# EAGLE board breakout (EAGLE 8.3.2), part 1 of 2
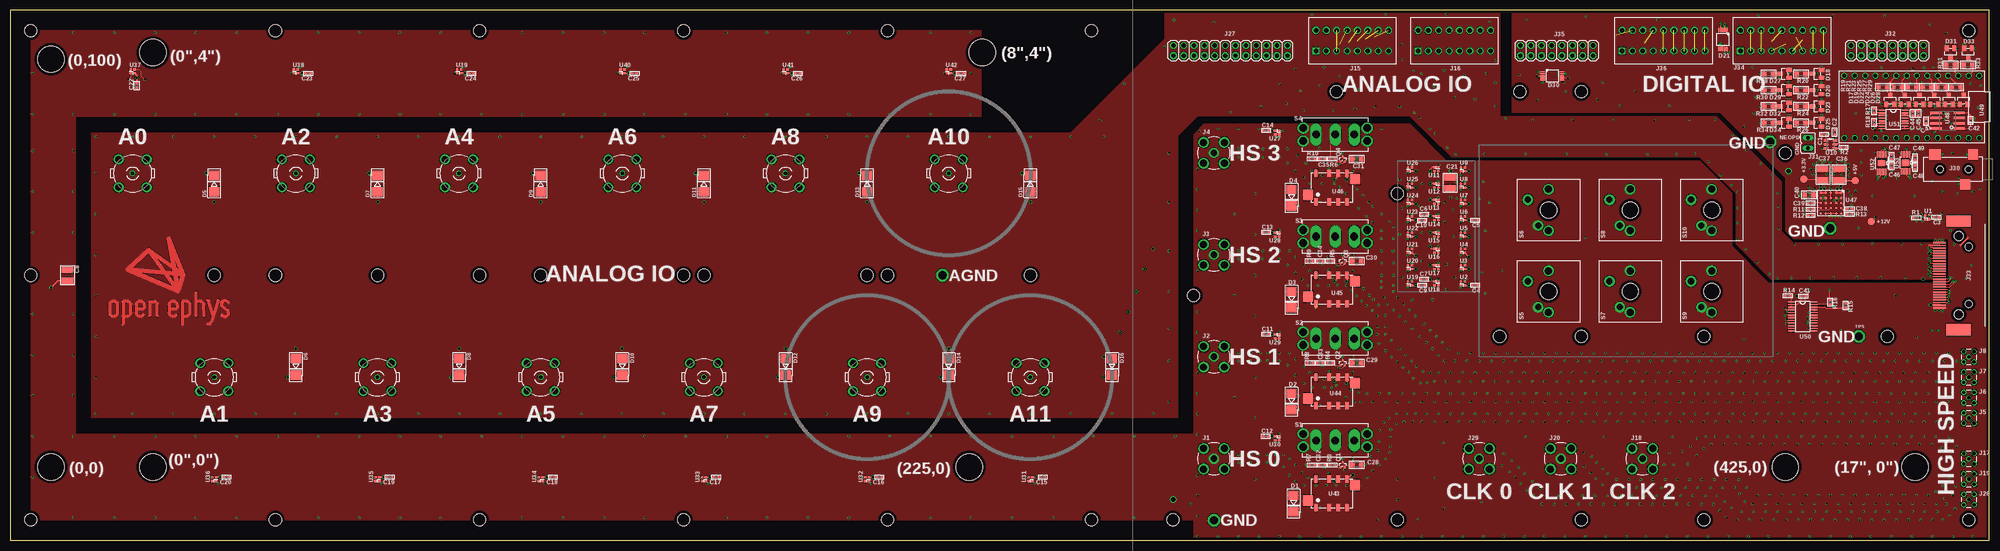
[diagram p0: board, top side]
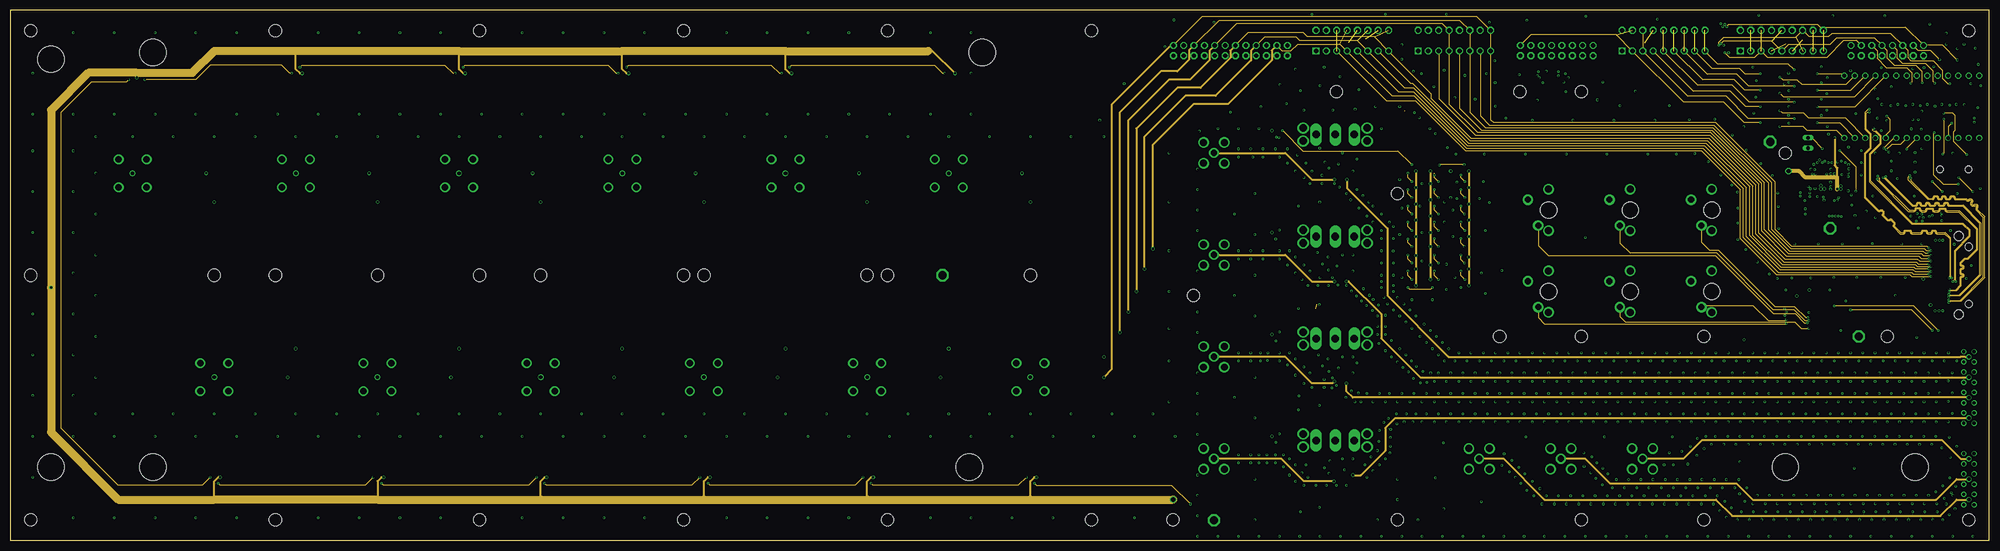
[diagram p1: board, inner layer HighSpeed]
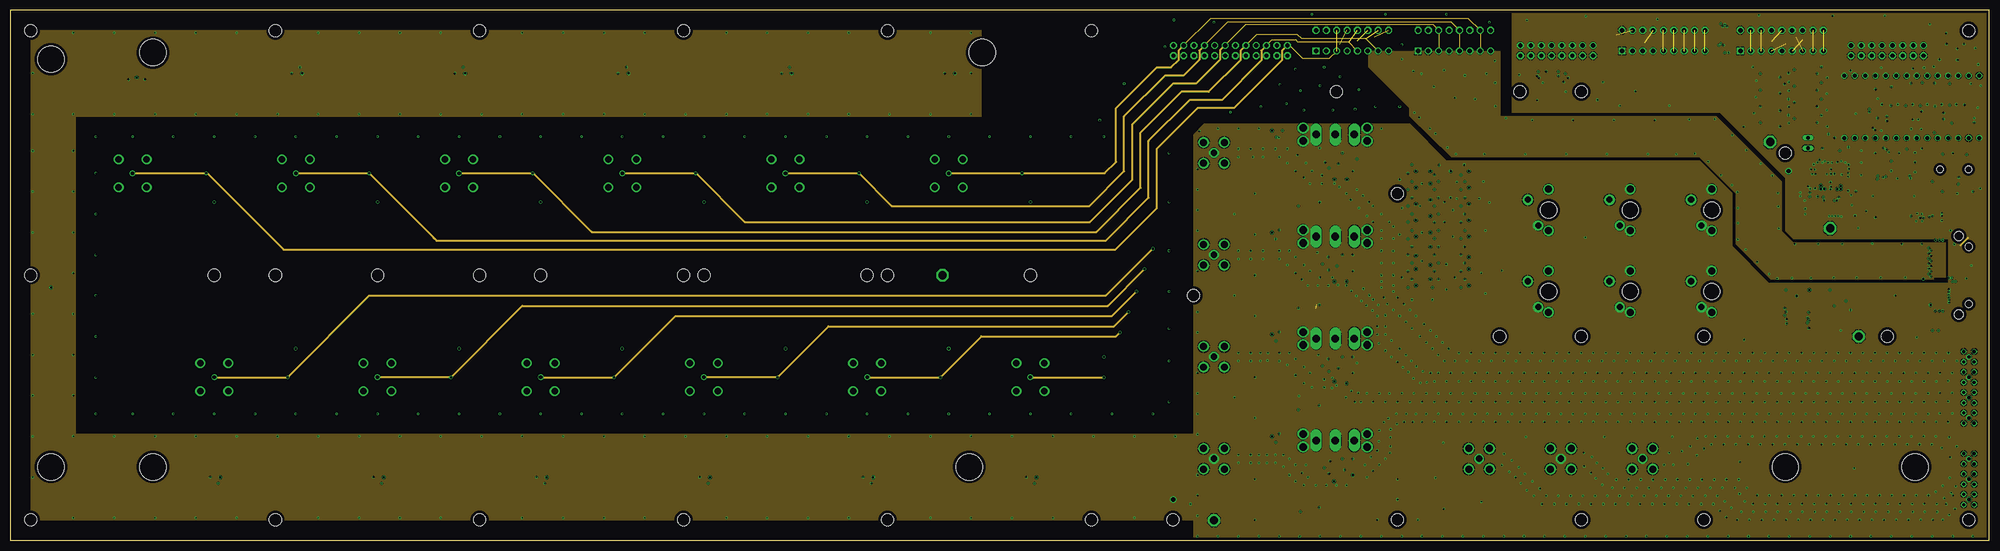
[diagram p2: board, inner layer GND2]
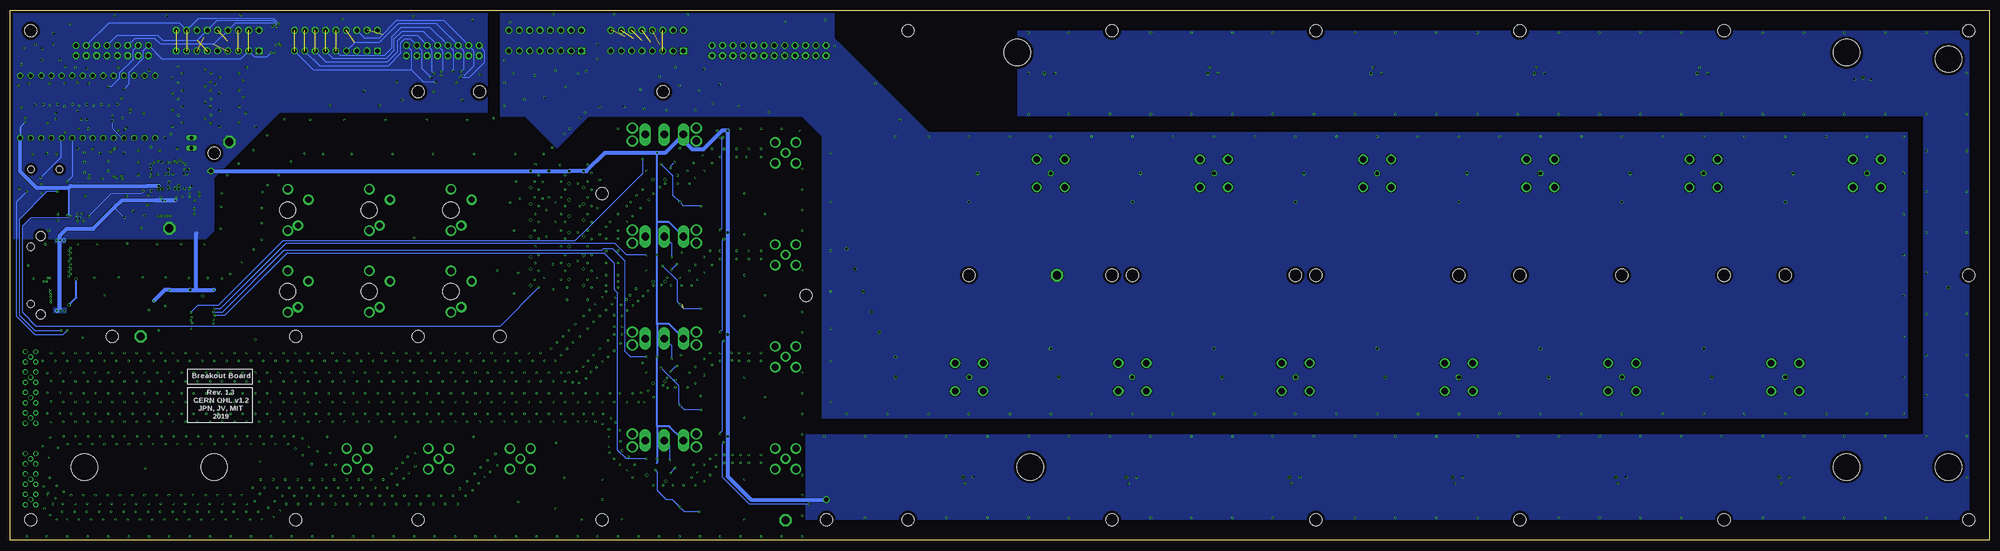
[diagram p3: board, bottom side, seen from below]

Size 485 x 130 mm. Coordinates in mm from the lower left corner, seen from the top.
Outline: 485,0 485,130 0,130 0,0 485,0
Copper layers (1+2*3+16): GND1 0.035mm / dielectric 0.2mm / HighSpeed 0.0175mm / dielectric 1.065mm / GND2 0.0356mm / dielectric 0.2007mm / LowSpeed 0.035mm
Design rules "jlcpcb-4-layer_JLC7628-stackup *": minimum track width 0.1mm, minimum drill 0.2mm, track to track 3.5mil, track to pad 0.1mm, pad to pad 0.1mm, via to via 0.1mm, smd to smd 0mil, copper to edge 0.7mm, drill to drill 5mil, minimum pad ring 4mil, minimum via ring 4mil, stop-mask expansion 3mil, vias tented up to drill 100mil, thermal gap 10mil
Net classes: 1 stripline: width 0.48 mm, drill 0.5 mm, clearance 0.1 mm; 3 100 Ohm Diff Mid: width 0.19 mm, drill 0.3 mm, clearance 0.09 mm
Holes 3 mm at 5,125 5,5 480,125 480,5 265,125 285,5 265,5 215,5 165,5 115,5 65,5 65,125 115,125 165,125 215,125 65,65 115,65 165,65 215,65 5,65 290,60 325,110 385,5 370,110 415,5 385,110 50,65 90,65 130,65 170,65 210,65 250,65 435,95 415,50 385,50 460,50 365,50 340,85 340,5
Holes 6.5 mm at 10,18 35,18 10,118 35,119.6 238.2,119.6 466.8,18 235,18 435,18

## Footprints (pad centres in the part's own frame; a part is rotated, then mirrored left to right if it is on the bottom)
0402 = smd 0.686 x 0.762: 1 -0.533,0; 2 0.533,0
1210 = smd 1.651 x 2.794: 1 -1.397,0; 2 1.397,0
0805 = smd 0.965 x 1.524: 1 -1.041,0; 2 1.041,0
SMA-DO214AC = smd 2.3 x 2.5: A -2,0; C 2,0
SOT23 = smd 1 x 1.4: 1 -0.95,-1.1; 2 0.95,-1.1; 3 0,1.1
MSOP-10-3X3 = smd 1.1 x 0.29: 1 -2.35,1; 2 -2.35,0.5; 3 -2.35,0; 4 -2.35,-0.5; 5 -2.35,-1; 6 2.35,-1; 7 2.35,-0.5; 8 2.35,0; 9 2.35,0.5; 10 2.35,1
SMA_JACK_142-0701-201 = drill 1.575: CLK 0,0 | drill 1.702: GND$1 -2.54,2.54; GND$2 2.54,2.54; GND$3 -2.54,-2.54; GND$4 2.54,-2.54
MMCX-THRU = drill 0.8: GND@1 -1.27,1.27; GND@2 -1.27,-1.27; GND@3 1.27,-1.27; GND@4 1.27,1.27; SIG 0,0
0731010360 = drill 0.9: 1 0,0 | drill 1.6: 2 3.43,3.43; 3 -3.43,3.43; 4 -3.43,-3.43; 5 3.43,-3.43
SCREW8-2 = drill 1.1 square: 1 0,0 | drill 1.1 octagon: 2 2.54,0; 3 5.08,0; 4 7.62,0; 5 10.16,0; 6 12.7,0; 7 15.24,0; 8 17.78,0; 9 0,5.08; 10 2.54,5.08; 11 5.08,5.08; 12 7.62,5.08; 13 10.16,5.08; 14 12.7,5.08; 15 15.24,5.08; 16 17.78,5.08
2X12-BIG = drill 1.016 pad 1.676 octagon: 1 -13.97,-1.17; 2 -13.97,1.37; 3 -11.43,-1.17; 4 -11.43,1.37; 5 -8.89,-1.17; 6 -8.89,1.37; 7 -6.35,-1.17; 8 -6.35,1.37; 9 -3.81,-1.17; 10 -3.81,1.37; 11 -1.27,-1.17; 12 -1.27,1.37; 13 1.27,-1.17; 14 1.27,1.37; 15 3.81,-1.17; 16 3.81,1.37; 17 6.35,-1.17; 18 6.35,1.37; 19 8.89,-1.17; 20 8.89,1.37; 21 11.43,-1.17; 22 11.43,1.37; 23 13.97,-1.17; 24 13.97,1.37
35RASMT2BHNTRX = smd 2.4 x 2.55: 1 0.8,3.675; 5 -1.1,-3.675 | smd 2.9 x 2.75: 4 8.2,-3.575 | hole 1.6: 0,0; 7,0
JP2 = drill 0.914 long: 1 0,0; 2 2.54,0
2X08-BIG = drill 1.016 pad 1.676 octagon: 1 -8.89,-1.17; 2 -8.89,1.37; 3 -6.35,-1.17; 4 -6.35,1.37; 5 -3.81,-1.17; 6 -3.81,1.37; 7 -1.27,-1.17; 8 -1.27,1.37; 9 1.27,-1.17; 10 1.27,1.37; 11 3.81,-1.17; 12 3.81,1.37; 13 6.35,-1.17; 14 6.35,1.37; 15 8.89,-1.17; 16 8.89,1.37
12226-82X0-00XX = smd 0.335 x 3: 1 7.938,7.2; 2 6.668,7.2; 3 5.397,7.2; 4 4.128,7.2; 5 2.857,7.2; 6 1.587,7.2; 7 0.318,7.2; 8 -0.953,7.2; 9 -2.223,7.2; 10 -3.493,7.2; 11 -4.763,7.2; 12 -6.032,7.2; 13 -7.303,7.2; 14 7.303,7.2; 15 6.032,7.2; 16 4.763,7.2; 17 3.493,7.2; 18 2.223,7.2; 19 0.953,7.2; 20 -0.318,7.2; 21 -1.587,7.2; 22 -2.857,7.2; 23 -4.128,7.2; 24 -5.397,7.2; 25 -6.668,7.2; 26 -7.938,7.2 | smd 2.8 x 6: PAD1 -13.3,2.5; PAD2 13.3,2.5 | hole 1.8: 7,0; -7,0 | hole 2.3: 9.6,2.5; -9.6,2.5
SCREW9-2 = drill 1.1 square: 1 0,0 | drill 1.1 octagon: 2 2.54,0; 3 5.08,0; 4 7.62,0; 5 10.16,0; 6 12.7,0; 7 15.24,0; 8 17.78,0; 9 20.32,0; 10 0,5.08; 11 2.54,5.08; 12 5.08,5.08; 13 7.62,5.08; 14 10.16,5.08; 15 12.7,5.08; 16 15.24,5.08; 17 17.78,5.08; 18 20.32,5.08
SC75 = smd 0.356 x 0.503: 1 -0.508,-0.65; 2 0.508,-0.65; 3 0,0.65
CK_7101J1V3QE2 = drill 1.85 long: 1 0,0 | drill 1.85 pad 2.54 long: 2 0,4.7; 3 0,-4.7 | drill 1.85: P$4 -1.59,7.875; P$5 1.59,7.875; P$6 -1.59,-7.875; P$7 1.59,-7.875
CHERRY-MX = drill 1.714 pad 1.93: P$3 -5.08,0; P$4 5.08,0 | drill 1.5 pad 2.54: SW1 -3.81,2.54; SW2 2.54,5.08 | hole 4: 0,0
TP19R = smd 1.9 x 1.9: TP 0,0
TESTPOINT_2MM = drill 2 octagon: 1 0,0
NEOPIXEL-1.5X1.5 = smd 0.55 x 0.55: 1 -0.475,-0.475; 2 0.475,-0.475; 3 0.475,0.475; 4 -0.475,0.475
SOT23-6 = smd 0.65 x 1.06: 1 -0.95,-1.1; 2 0,-1.1; 3 0.95,-1.1; 4 0.95,1.1; 5 0,1.1; 6 -0.95,1.1
G6KU-2F-RF = smd 0.8 x 1.8: 1 0,-3.5; 1X6 5.4,3.5; 2 3.2,-3.5; 3 5.4,-3.5; 4 7.6,-3.5; 5 7.6,3.5; 6 3.2,3.5; 7 0,3.5 | smd 2.5 x 2.5: CASE1 -1.95,-1.75; CASE2 9.55,2.05
BGA_5X5_625X625 = smd 0.635 x 0.635: A1 -2.54,2.54; A2 -1.27,2.54; A3 0,2.54; A4 1.27,2.54; A5 2.54,2.54; B1 -2.54,1.27; B2 -1.27,1.27; B3 0,1.27; B4 1.27,1.27; B5 2.54,1.27; C1 -2.54,0; C2 -1.27,0; C3 0,0; C4 1.27,0; C5 2.54,0; D1 -2.54,-1.27; D2 -1.27,-1.27; D3 0,-1.27; D4 1.27,-1.27; D5 2.54,-1.27; E1 -2.54,-2.54; E2 -1.27,-2.54; E3 0,-2.54; E4 1.27,-2.54; E5 2.54,-2.54
SO-08 = smd 0.6 x 2.708: 1 -1.905,-2.854; 2 -0.635,-2.854; 3 0.635,-2.854; 4 1.905,-2.854; 5 1.905,2.854; 6 0.635,2.854; 7 -0.635,2.854; 8 -1.905,2.854
TINY-FPGA-BX_BASIC = drill 0.965: 1 -7.62,13.97; 2 -7.62,11.43; 3 -7.62,8.89; 3.3V 7.62,11.43; 4 -7.62,6.35; 5 -7.62,3.81; 6 -7.62,1.27; 7 -7.62,-1.27; 8 -7.62,-3.81; 9 -7.62,-6.35; 10 -7.62,-8.89; 11 -7.62,-11.43; 12 -7.62,-13.97; 13 -7.62,-16.51; 14 7.62,-16.51; 15 7.62,-13.97; 16 7.62,-11.43; 17 7.62,-8.89; 18 7.62,-6.35; 19 7.62,-3.81; 20 7.62,-1.27; 21 7.62,1.27; 22 7.62,3.81; 23 7.62,6.35; 24 7.62,8.89; GND@1 -7.62,16.51; GND@2 7.62,13.97; VIN 7.62,16.51
TSSOP-24 = smd 1.6 x 0.3: 1 -2.8,3.575; 2 -2.8,2.925; 3 -2.8,2.275; 4 -2.8,1.625; 5 -2.8,0.975; 6 -2.8,0.325; 7 -2.8,-0.325; 8 -2.8,-0.975; 9 -2.8,-1.625; 10 -2.8,-2.275; 11 -2.8,-2.925; 12 -2.8,-3.575; 13 2.8,-3.575; 14 2.8,-2.925; 15 2.8,-2.275; 16 2.8,-1.625; 17 2.8,-0.975; 18 2.8,-0.325; 19 2.8,0.325; 20 2.8,0.975; 21 2.8,1.625; 22 2.8,2.275; 23 2.8,2.925; 24 2.8,3.575
TSSOP-16 = smd 1.6 x 0.3: 1 -2.8,2.275; 2 -2.8,1.625; 3 -2.8,0.975; 4 -2.8,0.325; 5 -2.8,-0.325; 6 -2.8,-0.975; 7 -2.8,-1.625; 8 -2.8,-2.275; 9 2.8,-2.275; 10 2.8,-1.625; 11 2.8,-0.975; 12 2.8,-0.325; 13 2.8,0.325; 14 2.8,0.975; 15 2.8,1.625; 16 2.8,2.275
MSOP-8-PAD-3X3 = smd 1.6 x 0.4: 1 -2.1,0.975; 2 -2.1,0.325; 3 -2.1,-0.325; 4 -2.1,-0.975; 5 2.1,-0.975; 6 2.1,-0.325; 7 2.1,0.325; 8 2.1,0.975 | smd 1.57 x 1.89: PAD 0,0

## Placement (x,y rotation side)
C1  0.1uF  [0402]  444.5,99.6 180 top
C2  0.1uF  [0402]  447.1,100.1 90 top
C3  0.1uF  [0402]  472,79.2 180 top
C4  0.1uF  [0402]  359,62.5 180 top
C5  0.1uF  [0402]  359,78.5 180 top
C6  0.1uF  [0402]  346.5,80 0 top
C7  0.1uF  [0402]  346.5,64 0 top
C8  47uF  [1210]  14,65 270 top
C9  0.1uF  [0402]  346,62.5 180 top
C10  0.1uF  [0402]  346,78.5 180 top
C11  0.1uF  [0402]  307.8,50.5 0 top
C12  0.1uF  [0402]  307.7,25.5 0 top
C13  0.1uF  [0402]  307.8,75.5 0 top
C14  0.1uF  [0402]  307.8,100.5 0 top
C15  0.1uF  [0402]  253,15.5 180 top
C16  0.1uF  [0402]  213,15.5 180 top
C17  0.1uF  [0402]  173,15.5 180 top
C18  0.1uF  [0402]  133,15.5 180 top
C19  0.1uF  [0402]  93,15.5 180 top
C20  0.1uF  [0402]  53,15.5 180 top
C21  47uF  [1210]  352.9,87.7 90 top
C22  0.1uF  [0402]  31,111.5 90 top
C23  0.1uF  [0402]  73,114.5 180 top
C24  0.1uF  [0402]  113,114.5 180 top
C25  0.1uF  [0402]  153,114.5 180 top
C26  0.1uF  [0402]  193,114.5 180 top
C27  0.1uF  [0402]  233,114.5 180 top
C28  10uF  [0805]  330,18.5 180 top
C29  10uF  [0805]  330,43.5 180 top
C30  10uF  [0805]  330,68.5 180 top
C31  10uF  [0805]  330,93.5 180 top
C32  47nF  [0402]  321.5,18.5 0 top
C33  47nF  [0402]  321,43.5 0 top
C34  47nF  [0402]  321,68.5 0 top
C35  47nF  [0402]  321.5,93.5 0 top
C36  47uF  [1210]  448.2,89.7 270 top
C37  47uF  [1210]  444.2,89.7 270 top
C38  0.1uF  [0402]  450.8,81.3 180 top
C39  0.1uF  [0402]  441.2,82.7 0 top
C40  10uF  [0805]  440.8,84.7 0 top
C41  0.1uF  [0402]  469.5,102.8 90 top
C42  0.1uF  [0402]  480.4,103 270 top
C43  0.1uF  [0402]  439.4,59.9 0 top
C44  4.7nF  [0402]  466.2,104.7 270 top
C45  0.1uF  [0402]  467.6,104.7 270 top
C46  4.7nF  [0402]  461,91.8 270 top
C47  0.1uF  [0402]  461,94.1 90 top
C48  4.7nF  [0402]  466.8,91.5 270 top
C49  0.1uF  [0402]  466.8,93.8 90 top
D1  S1GTR  [SMA-DO214AC]  314.5,9 270 top
D2  S1GTR  [SMA-DO214AC]  314,34 270 top
D3  S1GTR  [SMA-DO214AC]  314,59 270 top
D4  S1GTR  [SMA-DO214AC]  314,84 270 top
D5  P6SMB18CA  [SMA-DO214AC]  50,87.5 90 top
D6  P6SMB18CA  [SMA-DO214AC]  70,42.5 270 top
D7  P6SMB18CA  [SMA-DO214AC]  90,87.5 90 top
D8  P6SMB18CA  [SMA-DO214AC]  110,42.5 270 top
D9  P6SMB18CA  [SMA-DO214AC]  130,87.5 90 top
D10  P6SMB18CA  [SMA-DO214AC]  150,42.5 270 top
D11  P6SMB18CA  [SMA-DO214AC]  170,87.5 90 top
D12  P6SMB18CA  [SMA-DO214AC]  190,42.5 270 top
D13  P6SMB18CA  [SMA-DO214AC]  210,87.5 90 top
D14  P6SMB18CA  [SMA-DO214AC]  230,42.5 270 top
D15  P6SMB18CA  [SMA-DO214AC]  250,87.5 90 top
D16  P6SMB18CA  [SMA-DO214AC]  270,42.5 270 top
D17  BAT54SLT1G  [SOT23]  460.7,108 0 top
D18  BAT54SLT1G  [SOT23]  442.8,114.4 90 top
D19  BAT54SLT1G  [SOT23]  464.3,108 0 top
D20  BAT54SLT1G  [SOT23]  442.8,110.4 90 top
D21  CM1213−08MR  [MSOP-10-3X3]  419.7,122.8 270 top
D22  BAT54SLT1G  [SOT23]  467.9,108 0 top
D23  BAT54SLT1G  [SOT23]  442.8,106.4 90 top
D24  BAT54SLT1G  [SOT23]  471.5,108 0 top
D25  BAT54SLT1G  [SOT23]  442.8,102.4 90 top
D26  BAT54SLT1G  [SOT23]  475.1,108 0 top
D27  BAT54SLT1G  [SOT23]  434.8,114.4 90 top
D28  BAT54SLT1G  [SOT23]  478.7,108 0 top
D29  BAT54SLT1G  [SOT23]  434.8,110.4 90 top
D30  CM1213−08MR  [MSOP-10-3X3]  377.9,113.9 0 top
D31  BAT54SLT1G  [SOT23]  475.5,119.6 180 top
D32  BAT54SLT1G  [SOT23]  434.8,106.4 90 top
D33  BAT54SLT1G  [SOT23]  479.8,119.6 180 top
D34  BAT54SLT1G  [SOT23]  434.8,102.4 90 top
J1  [SMA_JACK_142-0701-201]  295,20 0 top
J2  [SMA_JACK_142-0701-201]  295,45 0 top
J3  [SMA_JACK_142-0701-201]  295,70 0 top
J4  [SMA_JACK_142-0701-201]  295,95 0 top
J5  [MMCX-THRU]  480,30 0 top
J6  [MMCX-THRU]  480,35 0 top
J7  [MMCX-THRU]  480,40 0 top
J8  [MMCX-THRU]  480,45 0 top
J9  [0731010360]  30,90 0 top
J10  [0731010360]  50,40 0 top
J11  [0731010360]  70,90 0 top
J12  [0731010360]  90,40 0 top
J13  [0731010360]  110,90 0 top
J14  [0731010360]  130,40 0 top
J15  1789472  [SCREW8-2]  320,120 0 top
J16  1789472  [SCREW8-2]  345,120 0 top
J17  [MMCX-THRU]  480,20 0 top
J18  [SMA_JACK_142-0701-201]  400,20 0 top
J19  [MMCX-THRU]  480,15 0 top
J20  [SMA_JACK_142-0701-201]  380,20 0 top
J21  [0731010360]  150,90 0 top
J22  [0731010360]  170,40 0 top
J23  [0731010360]  190,90 0 top
J24  [0731010360]  210,40 0 top
J25  [0731010360]  230,90 0 top
J26  [0731010360]  250,40 0 top
J27  69168-124HLF  [2X12-BIG]  299,120 0 top
J28  [MMCX-THRU]  480,10 0 top
J29  [SMA_JACK_142-0701-201]  360,20 0 top
J30  SJ1-3514-SMT-TR  [35RASMT2BHNTRX]  479.9,91 180 top
J31  [JP2]  440.6,98.7 270 top
J32  69168-116HLF  [2X08-BIG]  460,120 0 top
J33  12226-8250-00FR  [12226-82X0-00XX]  480,65 90 top
J34  1888276  [SCREW9-2]  424,120 0 top
J35  69168-116HLF  [2X08-BIG]  379,120 0 top
J36  1888276  [SCREW9-2]  395,120 0 top
Q1  SI1012R  [SC75]  326.5,18.5 0 top
Q2  SI1012R  [SC75]  326.5,43.5 0 top
Q3  SI1012R  [SC75]  326.5,68.5 0 top
Q4  SI1012R  [SC75]  326.5,93.5 0 top
R1  500  [0402]  467.1,79.1 0 top
R2  4.7k  [0402]  449.3,96.4 180 top
R3  1k  [0402]  324,18.5 0 top
R4  1k  [0402]  323.5,43.5 180 top
R5  1k  [0402]  323.5,68.5 180 top
R6  1k  [0402]  324,93.5 180 top
R7  49.9  [0402]  319,18.5 180 top
R8  49.9  [0402]  318.5,43.5 180 top
R9  49.9  [0402]  318.5,68.5 180 top
R10  49.9  [0402]  319,93.5 180 top
R11  12.5k  [0402]  441.2,81.2 180 top
R12  649k  [0402]  441.2,79.7 180 top
R13  8.25k  [0402]  450.8,79.9 0 top
R14  4.7k  [0402]  435.6,60 0 top
R15  4.7k  [0402]  449.8,57.6 270 top
R16  4.7k  [0402]  446,58.4 270 top
R17  100  [0402]  456.8,105.3 270 top
R18  100  [0402]  456.8,102.5 90 top
R19  270, 0.5W  [0805]  458.9,111.1 180 top
R20  270, 0.5W  [0805]  438.9,114.4 180 top
R21  270, 0.5W  [0805]  462.5,111.1 180 top
R22  270, 0.5W  [0805]  438.9,110.4 180 top
R23  270, 0.5W  [0805]  466.1,111.1 180 top
R24  270, 0.5W  [0805]  438.9,106.4 180 top
R25  270, 0.5W  [0805]  469.7,111.1 180 top
R26  270, 0.5W  [0805]  438.9,102.4 180 top
R27  270, 0.5W  [0805]  473.3,111.1 180 top
R28  270, 0.5W  [0805]  430.9,114.4 180 top
R29  270, 0.5W  [0805]  476.9,111.1 180 top
R30  270, 0.5W  [0805]  430.9,110.4 180 top
R31  270, 0.5W  [0805]  475.5,116.6 180 top
R32  270, 0.5W  [0805]  430.9,106.4 180 top
R33  270, 0.5W  [0805]  479.8,116.6 180 top
R34  270, 0.5W  [0805]  430.9,102.4 180 top
S1  7101J1V3BE2  [CK_7101J1V3QE2]  324.7,24.5 270 top
S2  7101J1V3BE2  [CK_7101J1V3QE2]  324.7,49.5 270 top
S3  7101J1V3BE2  [CK_7101J1V3QE2]  324.7,74.5 270 top
S4  7101J1V3BE2  [CK_7101J1V3QE2]  324.7,99.5 270 top
S5  CHERRY-MX  [CHERRY-MX]  377,61 90 top
S6  CHERRY-MX  [CHERRY-MX]  377,81 90 top
S7  CHERRY-MX  [CHERRY-MX]  397,61 90 top
S8  CHERRY-MX  [CHERRY-MX]  397,81 90 top
S9  CHERRY-MX  [CHERRY-MX]  417,61 90 top
S10  CHERRY-MX  [CHERRY-MX]  417,81 90 top
TP1  [TP19R]  439.6,88.6 270 top
TP2  [TP19R]  452.2,88.2 270 top
TP3  [TESTPOINT_2MM]  446,76.5 0 top
TP4  [TESTPOINT_2MM]  431.3,97.7 90 top
TP5  [TESTPOINT_2MM]  453,50 0 top
TP6  [TESTPOINT_2MM]  295,4.9 0 top
TP7  [TESTPOINT_2MM]  228.5,65 0 top
TP8  [TP19R]  456.1,78.2 0 top
U1  SK6805-E-J  [NEOPIXEL-1.5X1.5]  469.8,79.2 0 top
U2  SK6805-E-J  [NEOPIXEL-1.5X1.5]  356,63 0 top
U3  SK6805-E-J  [NEOPIXEL-1.5X1.5]  356,67 0 top
U4  SK6805-E-J  [NEOPIXEL-1.5X1.5]  356,71 0 top
U5  SK6805-E-J  [NEOPIXEL-1.5X1.5]  356,75 0 top
U6  SK6805-E-J  [NEOPIXEL-1.5X1.5]  356,79 0 top
U7  SK6805-E-J  [NEOPIXEL-1.5X1.5]  356,83 0 top
U8  SK6805-E-J  [NEOPIXEL-1.5X1.5]  356,87 0 top
U9  SK6805-E-J  [NEOPIXEL-1.5X1.5]  356,91 0 top
U10  TXB0101  [SOT23-6]  446.1,97.1 270 top
U11  SK6805-E-J  [NEOPIXEL-1.5X1.5]  349.5,91 180 top
U12  SK6805-E-J  [NEOPIXEL-1.5X1.5]  349.5,87 180 top
U13  SK6805-E-J  [NEOPIXEL-1.5X1.5]  349.5,83 180 top
U14  SK6805-E-J  [NEOPIXEL-1.5X1.5]  349.5,79 180 top
U15  SK6805-E-J  [NEOPIXEL-1.5X1.5]  349.5,75 180 top
U16  SK6805-E-J  [NEOPIXEL-1.5X1.5]  349.5,71 180 top
U17  SK6805-E-J  [NEOPIXEL-1.5X1.5]  349.5,67 180 top
U18  SK6805-E-J  [NEOPIXEL-1.5X1.5]  349.5,63 180 top
U19  SK6805-E-J  [NEOPIXEL-1.5X1.5]  343,63 0 top
U20  SK6805-E-J  [NEOPIXEL-1.5X1.5]  343,67 0 top
U21  SK6805-E-J  [NEOPIXEL-1.5X1.5]  343,71 0 top
U22  SK6805-E-J  [NEOPIXEL-1.5X1.5]  343,75 0 top
U23  SK6805-E-J  [NEOPIXEL-1.5X1.5]  343,79 0 top
U24  SK6805-E-J  [NEOPIXEL-1.5X1.5]  343,83 0 top
U25  SK6805-E-J  [NEOPIXEL-1.5X1.5]  343,87 0 top
U26  SK6805-E-J  [NEOPIXEL-1.5X1.5]  343,91 0 top
U27  SK6805-E-J  [NEOPIXEL-1.5X1.5]  310.5,100 180 top
U28  SK6805-E-J  [NEOPIXEL-1.5X1.5]  310.5,75 180 top
U29  SK6805-E-J  [NEOPIXEL-1.5X1.5]  310.5,50 180 top
U30  SK6805-E-J  [NEOPIXEL-1.5X1.5]  310.5,25 180 top
U31  SK6805-E-J  [NEOPIXEL-1.5X1.5]  250,15 90 top
U32  SK6805-E-J  [NEOPIXEL-1.5X1.5]  210,15 90 top
U33  SK6805-E-J  [NEOPIXEL-1.5X1.5]  170,15 90 top
U34  SK6805-E-J  [NEOPIXEL-1.5X1.5]  130,15 90 top
U35  SK6805-E-J  [NEOPIXEL-1.5X1.5]  90,15 90 top
U36  SK6805-E-J  [NEOPIXEL-1.5X1.5]  50,15 90 top
U37  SK6805-E-J  [NEOPIXEL-1.5X1.5]  30,115 0 top
U38  SK6805-E-J  [NEOPIXEL-1.5X1.5]  70,115 0 top
U39  SK6805-E-J  [NEOPIXEL-1.5X1.5]  110,115 0 top
U40  SK6805-E-J  [NEOPIXEL-1.5X1.5]  150,115 0 top
U41  SK6805-E-J  [NEOPIXEL-1.5X1.5]  190,115 0 top
U42  SK6805-E-J  [NEOPIXEL-1.5X1.5]  230,115 0 top
U43  G6K-2F-RF  [G6KU-2F-RF]  320,11.5 0 top
U44  G6K-2F-RF  [G6KU-2F-RF]  320,36.5 0 top
U45  G6K-2F-RF  [G6KU-2F-RF]  320,61.5 0 top
U46  G6K-2F-RF  [G6KU-2F-RF]  320,86.5 0 top
U47  LTM4622A  [BGA_5X5_625X625]  446.2,82.7 270 top
U48  SI8610  [SO-08]  474.8,102.9 90 top
U49  TINY-FPGA-BX  [TINY-FPGA-BX_BASIC]  466,106.3 270 top
U50  TCA9555  [TSSOP-24]  439.3,54.9 0 top
U51  FIN1032MTCX  [TSSOP-16]  461.5,103.2 0 top
U52  SN65LVDS9638DGN  [MSOP-8-PAD-3X3]  458.6,92.5 270 top
U53  SN65LVDS9638DGN  [MSOP-8-PAD-3X3]  464.5,92.6 270 top
X  OE-LOGO_28X20  [OE-LOGO-28X20]  37.6,60.4 0 top

## Library data of the parts
C1-C27 C32-C39 C41-C49 D1-D34 J1-J36 Q1-Q4 R1-R34 S1-S10 TP1-TP8 U1-U47 U49-U53 X = jonnew
C28-C31 C40 = jonnew; MN: TDK Corp.; PARTNO: C2012X5R1Cxxxxxxx; VID: DK
U48 = CNP-ics 2

## Nets
!TCA_INT: R14.2 U50.1
+3V3: C1.1 C37.2 C43.2 C44.1 C45.1 C46.1 C47.1 C48.1 C49.1 D17.2 D18.2 D19.2 D20.2 D21.8 D22.2 D23.2 D24.2 D25.2 D26.2 D27.2 D28.2 D29.2 D30.8 D31.2 D32.2 D33.2 D34.2 R2.1 R14.1 R15.1 R16.1 TP1.TP U10.1 U47.D1 U47.E1 U50.24 U51.4 U51.16 U52.1 U53.1
+5V0: C2.1 C3.2 C4.2 C5.2 C6.2 C7.2 C8.2 C9.2 C10.2 C11.2 C12.2 C13.2 C14.2 C15.2 C16.2 C17.2 C18.2 C19.2 C20.2 C21.2 C22.2 C23.2 C24.2 C25.2 C26.2 C27.2 C36.2 C42.2 Q1.3 Q2.3 Q3.3 Q4.3 S1.3 S2.3 S3.3 S4.3 TP2.TP U1.2 U2.2 U3.2 U4.2 U5.2 U6.2 U7.2 U8.2 U9.2 U10.6 U11.2 U12.2 U13.2 U14.2 U15.2 U16.2 U17.2 U18.2 U19.2 U20.2 U21.2 U22.2 U23.2 U24.2 U25.2 U26.2 U27.2 U28.2 U29.2 U30.2 U31.2 U32.2 U33.2 U34.2 U35.2 U36.2 U37.2 U38.2 U39.2 U40.2 U41.2 U42.2 U47.A1 U47.B1 U48.1 U49.VIN
+12V: C40.2 J33.1 J33.26 TP8.TP U47.A2 U47.B2 U47.B3 U47.D2 U47.D3 U47.E2
AGND: D5.A D6.A D7.A D8.A D9.A D10.A D11.A D12.A D13.A D14.A D15.A D16.A J9.2 J9.3 J9.4 J9.5 J10.2 J10.3 J10.4 J10.5 J11.2 J11.3 J11.4 J11.5 J12.2 J12.3 J12.4 J12.5 J13.2 J13.3 J13.4 J13.5 J14.2 J14.3 J14.4 J14.5 J15.1 J15.2 J15.9 J15.10 J16.1 J16.2 J16.9 J16.10 J21.2 J21.3 J21.4 J21.5 J22.2 J22.3 J22.4 J22.5 J23.2 J23.3 J23.4 J23.5 J24.2 J24.3 J24.4 J24.5 J25.2 J25.3 J25.4 J25.5 J26.2 J26.3 J26.4 J26.5 J27.1 J27.3 J27.5 J27.7 J27.9 J27.11 J27.13 J27.15 J27.17 J27.19 J27.21 J27.23 J33.13 J33.14 TP7.1
AIO_0: D5.C J9.1 J15.3 J15.11 J27.24 J33.20
AIO_1: D6.C J10.1 J15.4 J15.12 J27.22 J33.7
AIO_2: D7.C J11.1 J15.5 J15.13 J27.20 J33.19
AIO_3: D8.C J12.1 J15.6 J15.14 J27.18 J33.6
AIO_4: D9.C J13.1 J15.7 J15.15 J27.16 J33.18
AIO_5: D10.C J14.1 J15.8 J15.16 J27.14 J33.5
AIO_6: D11.C J16.3 J16.11 J21.1 J27.12 J33.17
AIO_7: D12.C J16.4 J16.12 J22.1 J27.10 J33.4
AIO_8: D13.C J16.5 J16.13 J23.1 J27.8 J33.16
AIO_9: D14.C J16.6 J16.14 J24.1 J27.6 J33.3
AIO_10: D15.C J16.7 J16.15 J25.1 J27.4 J33.15
AIO_11: D16.C J16.8 J16.16 J26.1 J27.2 J33.2
BUTTON0: S6.SW1 U50.16
BUTTON1: S5.SW1 U50.9
BUTTON2: S8.SW1 U50.17
BUTTON3: S7.SW1 U50.14
BUTTON4: S10.SW1 U50.18
BUTTON5: S9.SW1 U50.8
DIN0: D30.4 J35.2 J36.2 J36.11 R34.2
DIN0_P: D34.3 R34.1 U49.14
DIN1: D30.3 J35.4 J36.3 J36.12 R26.2
DIN1_P: D25.3 R26.1 U49.15
DIN2: D30.2 J35.6 J36.4 J36.13 R32.2
DIN2_P: D32.3 R32.1 U49.16
DIN3: D30.1 J35.8 J36.5 J36.14 R24.2
DIN3_P: D23.3 R24.1 U49.9
DIN4: D30.10 J35.10 J36.6 J36.15 R30.2
DIN4_P: D29.3 R30.1 U49.10
DIN5: D30.9 J35.12 J36.7 J36.16 R22.2
DIN5_P: D20.3 R22.1 U49.11
DIN6: D30.7 J35.14 J36.8 J36.17 R28.2
DIN6_P: D27.3 R28.1 U49.12
DIN7: D30.6 J35.16 J36.9 J36.18 R20.2
DIN7_P: D18.3 R20.1 U49.13
DOUT0: D21.10 J32.2 J34.2 J34.11 R19.2
DOUT0_P: D17.3 R19.1 U49.8
DOUT1: D21.9 J32.4 J34.3 J34.12 R21.2
DOUT1_P: D19.3 R21.1 U49.7
DOUT2: D21.2 J32.6 J34.4 J34.13 R23.2
DOUT2_P: D22.3 R23.1 U49.6
DOUT3: D21.7 J32.8 J34.5 J34.14 R25.2
DOUT3_P: D24.3 R25.1 U49.5
DOUT4: D21.3 J32.10 J34.6 J34.15 R27.2
DOUT4_P: D26.3 R27.1 U49.4
DOUT5: D21.6 J32.12 J34.7 J34.16 R29.2
DOUT5_P: D28.3 R29.1 U49.3
DOUT6: D21.4 J32.14 J34.8 J34.17 R31.2
DOUT6_P: D31.3 R31.1 U49.2
DOUT7: D21.1 J32.16 J34.9 J34.18 R33.2
DOUT7_P: D33.3 R33.1 U49.1
GND: C1.2 C2.2 C3.1 C4.1 C5.1 C6.1 C7.1 C8.1 C9.1 C10.1 C11.1 C12.1 C13.1 C14.1 C15.1 C16.1 C17.1 C18.1 C19.1 C20.1 C21.1 C22.1 C23.1 C24.1 C25.1 C26.1 C27.1 C28.1 C29.1 C30.1 C31.1 C36.1 C37.1 C38.1 C39.1 C40.1 C42.1 C43.1 C44.2 C45.2 C46.2 C47.2 C48.2 C49.2 D1.A D2.A D3.A D4.A D17.1 D18.1 D19.1 D20.1 D21.5 D22.1 D23.1 D24.1 D25.1 D26.1 D27.1 D28.1 D29.1 D30.5 D31.1 D32.1 D33.1 D34.1 J1.GND$1 J1.GND$2 J1.GND$3 J1.GND$4 J2.GND$1 J2.GND$2 J2.GND$3 J2.GND$4 J3.GND$1 J3.GND$2 J3.GND$3 J3.GND$4 J4.GND$1 J4.GND$2 J4.GND$3 J4.GND$4 J5.GND@1 J5.GND@2 J5.GND@3 J5.GND@4 J6.GND@1 J6.GND@2 J6.GND@3 J6.GND@4 J7.GND@1 J7.GND@2 J7.GND@3 J7.GND@4 J8.GND@1 J8.GND@2 J8.GND@3 J8.GND@4 J17.GND@1 J17.GND@2 J17.GND@3 J17.GND@4 J18.GND$1 J18.GND$2 J18.GND$3 J18.GND$4 J19.GND@1 J19.GND@2 J19.GND@3 J19.GND@4 J20.GND$1 J20.GND$2 J20.GND$3 J20.GND$4 J28.GND@1 J28.GND@2 J28.GND@3 J28.GND@4 J29.GND$1 J29.GND$2 J29.GND$3 J29.GND$4 J31.2 J32.1 J32.3 J32.5 J32.7 J32.9 J32.11 J32.13 J32.15 J33.PAD1 J33.PAD2 J34.1 J34.10 J35.1 J35.3 J35.5 J35.7 J35.9 J35.11 J35.13 J35.15 J36.1 J36.10 R7.2 R8.2 R9.2 R10.2 R11.2 R12.2 R13.2 S1.2 S2.2 S3.2 S4.2 S5.SW2 S6.SW2 S7.SW2 S8.SW2 S9.SW2 S10.SW2 TP3.1 TP4.1 TP5.1 TP6.1 U1.4 U2.4 U3.4 U4.4 U5.4 U6.4 U7.4 U8.4 U9.4 U10.2 U11.4 U12.4 U13.4 U14.4 U15.4 U16.4 U17.4 U18.4 U19.4 U20.4 U21.4 U22.4 U23.4 U24.4 U25.4 U26.4 U27.4 U28.4 U29.4 U30.4 U31.4 U32.4 U33.4 U34.4 U35.4 U36.4 U37.4 U38.4 U39.4 U40.4 U41.4 U42.4 U43.7 U43.CASE1 U43.CASE2 U44.7 U44.CASE1 U44.CASE2 U45.7 U45.CASE1 U45.CASE2 U46.7 U46.CASE1 U46.CASE2 U47.B5 U47.C1 U47.C2 U47.C5 U47.D5 U48.4 U49.GND@1 U49.GND@2 U50.2 U50.3 U50.12 U50.21 U51.8 U51.9 U51.10 U51.12 U51.14 U51.15 U52.4 U52.PAD U53.3 U53.4 U53.PAD
HARP_CLKOUT: U48.2 U49.24
I2C_SCL: R15.2 U49.23 U50.22
I2C_SDA: R16.2 U49.22 U50.23
LOCKED: U9.3 U11.1
LVDS_DIN0_N [100 Ohm Diff Mid]: J33.23 U52.5
LVDS_DIN0_P [100 Ohm Diff Mid]: J33.10 U52.6
LVDS_DIN1_N [100 Ohm Diff Mid]: J33.11 U52.7
LVDS_DIN1_P [100 Ohm Diff Mid]: J33.24 U52.8
LVDS_DIN2_N [100 Ohm Diff Mid]: J33.25 U53.7
LVDS_DIN2_P [100 Ohm Diff Mid]: J33.12 U53.8
LVDS_DOUT0_N [100 Ohm Diff Mid]: J33.8 R17.1 U51.1
LVDS_DOUT0_P [100 Ohm Diff Mid]: J33.21 R17.2 U51.2
LVDS_DOUT1_N [100 Ohm Diff Mid]: J33.9 R18.1 U51.7
LVDS_DOUT1_P [100 Ohm Diff Mid]: J33.22 R18.2 U51.6
LVDS_IN_0: U49.18 U51.3
LVDS_IN_1: U49.17 U51.5
LVDS_OUT_0: U49.19 U52.3
LVDS_OUT_1: U49.20 U52.2
LVDS_OUT_2: U49.21 U53.2
N$1 [stripline]: J17.SIG J18.CLK
N$3 [stripline]: J19.SIG J20.CLK
N$4 [stripline]: J28.SIG J29.CLK
N$5: D1.C Q1.2 U43.1
N$7: U11.3 U12.1
N$8: U12.3 U13.1
N$9: U13.3 U14.1
N$10: U36.3 U37.1
N$11: U31.3 U32.1
N$13: U15.3 U16.1
N$14: U16.3 U17.1
N$15: C32.2 U43.6
N$16: C41.1 J30.1 U48.8
N$17: C41.2 J30.5 U48.5
N$18: J30.4 U48.6
N$19 [stripline]: J6.SIG U44.5
N$20: U17.3 U18.1
N$21: U1.3 U2.1
N$22: C33.1 R8.1
N$23: R3.1 S1.1
N$24: R13.1 U47.A4
N$25: R11.1 U47.E4
N$26: C38.2 U47.A3
N$27: C39.2 U47.E3
N$28 [stripline]: J5.SIG U43.5
N$29 [stripline]: J1.CLK U43.1X6
N$30: C32.1 R7.1
N$31: C33.2 U44.6
N$32: D3.C Q3.2 U45.1
N$33: C34.1 R9.1
N$34 [stripline]: J2.CLK U44.1X6
N$35: R4.2 S2.1
N$36: C34.2 U45.6
N$37 [stripline]: J7.SIG U45.5
N$38: R5.2 S3.1
N$39: D4.C Q4.2 U46.1
N$40: D2.C Q2.2 U44.1
N$41: U2.3 U3.1
N$42: U3.3 U4.1
N$43 [stripline]: J3.CLK U45.1X6
N$44: R6.2 S4.1
N$45: C35.1 R10.1
N$46: C35.2 U46.6
N$47 [stripline]: J8.SIG U46.5
N$48 [stripline]: J4.CLK U46.1X6
N$49: U4.3 U5.1
N$51: U6.3 U7.1
N$52: U7.3 U8.1
N$53: U8.3 U9.1
N$54: R1.2 U1.1
N$55: R1.1 U10.4
N$56: U5.3 U6.1
N$57: R2.2 U10.5
N$58: U14.3 U15.1
N$62: U32.3 U33.1
N$63: U33.3 U34.1
N$64: U34.3 U35.1
N$65: U35.3 U36.1
N$67: U37.3 U38.1
N$68: U38.3 U39.1
N$69: U39.3 U40.1
N$70: U40.3 U41.1
N$71: U41.3 U42.1
N$72: U18.3 U19.1
N$73: U19.3 U20.1
N$74: U20.3 U21.1
N$75: U21.3 U22.1
N$76: U22.3 U23.1
N$77: U23.3 U24.1
N$78: U24.3 U25.1
N$79: U25.3 U26.1
N$80: U26.3 U27.1
N$81: U27.3 U28.1
N$82: U28.3 U29.1
N$83: U29.3 U30.1
N$84: U30.3 U31.1
N$145: R12.1 U47.C4
NEOPIXEL_DIN: J31.1 U10.3
RELAY_SENSE_0: C28.2 Q1.1 R3.2 U50.6
RELAY_SENSE_1: C29.2 Q2.1 R4.1 U50.5
RELAY_SENSE_2: C30.2 Q3.1 R5.1 U50.4
RELAY_SENSE_3: C31.2 Q4.1 R6.1 U50.20

## Tracks (layer width: path | path; a pad name or v marks a point on that pad's centre or on a via)
!TCA_INT
  GND1 0.1: U50.1 436.5,59.63 R14.2
+3V3  (via drill 0.3, 0.5)
  GND1 0.1: R14.1 435.1,60.03 v435.1,61.4 | R2.1 v450.5,96.4 | U10.1 445,98.15 445.03,98.18
  GND1 0.2: U50.24 440.43,58.48 439.9,59 439.9,59.87 C43.2 | R16.1 445.9,59.03 v445.9,61.4 | R15.1 v449.8,58.72 | U51.4 457.62,103.53 v457.6,103.5 | D18.2 443.8,115.25 v443.8,116.1 | v443.8,112.24 443.8,111.35 D20.2 | v443.8,108.2 443.8,107.35 D23.2 | v443.8,104.2 443.8,103.35 D25.2 | v435.8,104.25 435.8,103.2 435.9,103.2 D34.2 | v435.8,108.2 435.8,107.35 D32.2 | D29.2 435.8,111.35 435.25,111.9 v434.8,111.9 | v435.8,114.6 435.8,115.35 D27.2 | D30.8 v379.4,113.9 | D21.8 419.7,121.2 v419.9,121.4 | v478.8,121.7 478.85,121.65 D33.2 | v474.5,121.7 474.55,121.65 D31.2 | v478.9,106.8 479.55,106.8 arc90 D28.2 | v475.3,106.7 475.85,106.7 arc90 D26.2 | v471.7,106.5 472.05,106.5 arc90 D24.2 | v468.1,106.6 468.5,106.6 arc90 468.9,107 468.9,106.95 arc-90 D22.2 | v464.5,106.6 465.1,106.6 arc90 465.4,106.9 D19.2 | v460.9,106.6 461.35,106.6 arc90 D17.2 | TP1.TP 444.2,88.6 C37.2 | v445.6,99.6 C1.1 445.03,98.18
  GND1 0.3: U51.16 465.96,105.47 C44.1 | C44.1 C45.1 467.63,105.2 v468.4,105.2 | C44.1 466.3,105.33 | C48.1 v466.8,92.7 C49.1 465.95,93.27 465.48,93.75 U53.1 | 461,93.5 C47.1 | 461,93.5 v461,93 C46.1 | 459.57,93.83 U52.1 460.68,93.5 461,93.5
  GND1 0.5: C37.2 444.1,88.2 | C43.2 440.9,60.87 v440.9,61.4
  GND1 0.508: U47.E1 U47.D1
  LowSpeed 0.1: 435.1,61.45 v435.1,61.4
  LowSpeed 1: 439.1,61.4 v435.1,61.4 | v449.8,58.72 447.12,61.4 v445.9,61.4 v440.9,61.4 439.1,61.4 | 439.1,61.4 439.4,61.7 439.4,75.3
  other vias: 443.7,86.2 444.6,86.2 443.7,87
  pour GND1 (rank 2, no thermals): 443.2,88.7 443.2,84.7 445.2,84.7 445.2,88.7
  pour LowSpeed (rank 3): 368,105 368,133.1 493,133.1 493,74 437,74 435,76 435,89 419,105
+5V0  (via drill 0.3, 0.3 pad 0.55, 0.5, 1)
  GND1 0.2: C2.1 v447.1,98.7 447.1,98.05 U10.6 | C3.2 470.99,78.72 U1.2
  GND1 0.3: Q3.3 v326.5,70 | Q2.3 v326.5,45 | Q1.3 v326.5,20 | Q4.3 v326.5,95 | U48.1 479.8,101 480.4,101.6 C42.2
  GND1 0.406: C19.2 92.44,15.47 v91.5,15.47 | C20.2 52.44,15.47 v51.5,15.47
  GND1 0.5: C36.2 448.3,88.2 TP2.TP | C42.2 481.25,102.47 v481.28,102.5 | C21.2 352.9,90.4 v353,90.5 | U24.2 344.48,82.53 v344.5,82.5 | U25.2 344.48,86.53 v344.5,86.5 | U26.2 344.48,90.53 v344.5,90.5 | U19.2 344.48,62.52 v344.5,62.5 C9.2 | U11.2 348.48,91.47 348,91 v348,90.5 | U9.2 357.5,90.53 v357.5,90.5 | U17.2 348,67.47 v348,67.5 | C7.2 v348,64 348.52,63.48 U18.2 | U8.2 357.5,86.53 v357.5,86.5 | U7.2 357.5,82.53 v357.5,82.5 | U6.2 357.5,78.53 v357.5,78.5 C5.2 | U5.2 357.5,74.53 v357.5,74.5 | U4.2 v357.5,69.5 | U3.2 357.48,66.53 v357.5,66.5 | U2.2 357.48,62.52 v357.5,62.5 C4.2 | U27.2 310,100.5 v309.17,100.5 C14.2 | C13.2 308.36,75.47 v309.2,75.47 U28.2 | U29.2 v309.2,50.48 309.18,50.5 C11.2 | U30.2 v309.2,25.48 309.18,25.5 C12.2 | v51.5,15.47 U36.2 | v91.5,15.47 U35.2 | U34.2 v131.5,15.47 131.53,15.5 C18.2 | U33.2 v171.5,15.47 172.44,15.47 C17.2 | U32.2 v211.5,15.47 212.44,15.47 C16.2 | U31.2 v251.5,15.47 252.44,15.47 C15.2 | C22.2 v31,113.5 31,114 U37.2 | C23.2 v71.5,114.5 70.5,114.5 U38.2 | C24.2 v111.5,114.5 110.5,114.5 U39.2 | C25.2 v151.5,114.5 150.5,114.5 arc-90 U40.2 | C26.2 v191.5,114.5 190.5,114.5 U41.2 | C8.2 11.6,63.6 v10,62 | U42.2 231.5,114.53 | 231.5,114.53 232.44,114.53 C27.2 | 231.5,114.53 v231.5,114.5 | v344.5,69.8 344.2,69.8 U21.2 | v344.5,66.5 343.5,66.5 U20.2 | v344.5,74.5 343.5,74.5 U22.2 | U23.2 344.48,78.53 v344.5,78.5 C10.2 | U15.2 348.02,75.47 v348,75.5 | U16.2 348.52,71.47 v348,72 | U14.2 348.02,79.47 v348,79.5 347.53,79.5 C6.2 | U13.2 348.02,83.47 v348,83.5 | U12.2 348.02,87.47 v348,87.5 | C3.2 471.4,79.2 v471,79.6
  GND1 0.508: U47.B1 U47.A1
  HighSpeed 0.5: 250,10 250,14.5 250.97,15.47 v251.5,15.47 | v211.5,15.47 211.5,15.5 211,15.5 210,14.5 210,10 | 170,10 170,14.5 171,15.5 171.5,15.5 v171.5,15.47 | 130,10 130,14.5 131,15.5 131.5,15.5 v131.5,15.47 | v91.5,15.47 91.47,15.5 91,15.5 90,14.5 90,10 | 50,10 50,14.5 51,15.5 51.48,15.5 v51.5,15.47 | 31,114.5 v31,113.5 31,114.65 | v71.5,114.5 71,114.5 70,115.5 70,120 | v111.5,114.5 111,114.5 110,115.5 110,120 | v151.5,114.5 151,114.5 150,115.5 150,120 | v191.5,114.5 191,114.5 190,115.5 190,120 | 225,120 226,120 v231.5,114.5 | v357.5,90.5 v357.5,86.5 v357.5,82.5 v357.5,78.5 v357.5,74.5 v357.5,69.5 v357.5,66.5 v357.5,62.5 | v344.5,90.5 v344.5,86.5 v344.5,82.5 v344.5,78.5 v344.5,74.5 v344.5,69.8 v344.5,66.5 v344.5,62.5 | v348,90.5 v348,87.5 v348,83.5 v348,79.5 v348,75.5 v348,72 v348,67.5 v348,64 | v447.1,98.7 447.1,92 447.78,91.32 447.78,89.05 arc-90 447.7,88.97 | 447.78,88.21 447.7,88.13
  HighSpeed 1: v435.8,90.5 438.4,90.5 439.93,88.97 447.7,88.97 447.7,88.13 v447.7,86.1
  HighSpeed 2: v285,10 250,10 210,10 170,10 130,10 90,10 50,10 26.5,10 10,26.5 v10,62 10,105.5 19.15,114.65 31,114.65 44.65,114.65 50,120 70,120 110,120 150,120 190,120 225,120
  LowSpeed 0.5: v326.5,95 326.5,95.1 326.6,95.2 326.8,95 v326.5,95 | 326.5,78 v326.5,70 326.5,53 | 326.5,53 v326.5,45 326.5,28 | 326.5,28 v326.5,20 326.5,19 | S3.3 323.5,78 326.5,78 | S2.3 323.5,53 326.5,53 | S1.3 323.5,28 326.5,28 | 326.5,78 v326.5,95 | v481.28,102.5 482.51,101.27 U49.VIN | 451.5,86.9 451.4,86.9 | v471,79.6 470.63,79.97 470.63,86.47
  LowSpeed 1: v326.5,95 324.5,95 S4.3 320,98 317.9,95.89 315.1,95.89 310.5,100.5 v309.17,100.5 309.17,75.5 v309.2,75.47 v309.2,50.48 v309.2,25.48 309.2,21.37 309.17,21.34 309.17,15.67 303.5,10 v285,10 | v448.6,86.9 451.4,86.9 470.2,86.9 470.63,86.47 478.57,86.47 482.51,90.41 U49.VIN | v435.8,90.5 v357.5,90.5 v353,90.5 v348,90.5 v344.5,90.5 343.83,90.5 339.33,95 326.8,95
  other vias: 448.6,86.1
  pour GND1 (rank 2, no thermals): 447.2,84.7 447.2,88.7 449.2,88.7 449.2,84.7
+12V  (via drill 0.3, 0.35)
  GND1 0.2: TP8.TP v457.1,79.2
  LowSpeed 0.2: v457.1,79.2 459.45,81.55
  LowSpeed 1: 471.8,73.7 v471.8,73.6 | v444.5,83.4 457.6,83.4 459.45,81.55 464.6,76.4 471.1,76.4 472.8,74.7 v472.8,73.6 472.8,56.8 473.3,56.3 v473.6,56.3
  other vias: 471.7,56.3 444.3,84.2 442.9,84.3 447.7,83.4 448.1,84.1 441,85.2 441,84.3 447,83.3 472.7,56.3 473.6,73.6
  pour GND1 (isolate 0.1, no thermals): 471.3,57.1 471.3,56 474.3,56 474.3,57.1
  pour LowSpeed (rank 2, no thermals): 471.3,57.1 471.3,55.8 474.3,55.8 474.3,57.1
  pour GND1 (no thermals): 471.5,74 471.5,72.9 474,72.9 474,74
  pour LowSpeed (no thermals): 471.5,74.2 471.5,72.9 474,72.9 474,74.2
  pour GND1 (no thermals): 440.8,83.9 443.4,83.9 444.8,82.5 445.6,82.5 445.6,84.6 443.1,84.6 442.3,85.4 442.3,85.5 440.8,85.5
  pour GND1 (no thermals): 446.8,82.5 446.8,84.5 449.3,84.5 449.3,83.7 449,83.7 447.8,82.5
  pour LowSpeed (no thermals): 440.8,83.9 443.4,83.9 444.8,82.5 449.3,82.5 449.3,84.6 443.1,84.6 442.3,85.4 442.3,85.5 440.8,85.5
AGND  (via drill 0.3, 0.5)
  GND1 0.48: 470.2,72.34 470.47,72.34 470.51,72.3 J33.14
  GND1 0.5: J33.13 v470.6,57.7 | v468.8,64.1
  LowSpeed 0.5: v470.6,57.7 468.8,59.5 v468.8,64.1
  other vias: 21,90 70,47 110,47 150,47 190,47 230,47 268,45 250,83 210,83 170,83 130,83 90,83 50,83 21,99 403,103 393,103 383,103 373,103 356.5,114 408.3,94.7 401.3,94.7 391.3,94.7 381.3,94.7 371.3,94.7 361.3,94.7 354.3,94.7 349.3,99.7 345.3,103.7 364,106.5 361.8,114.4 344.1,104.9 343.9,115 347.9,101 351.4,115.3 352.2,96.3 354,108.5 322,116 340.5,106.4 329.6,105.7 311.2,111.7 306.5,106.3 299,105 284,95 284,83 284,71 284,61 284,52 284,44 284,34 283,121 341,118 319,129.04 337,129.02 352,129.03 295,127 321,111.5 315,115.5 317,105.5 330.5,110.5 341,121.5 345.8,114.4 362.5,127 363.9,112.2 359,108.2 363.8,117.6 324.1,105.5 325.9,113.7 334.6,106.4 312.7,107.1 316.2,110.3 412.8,94.8 416.1,92.9 419.2,89.6 421.9,87.1 423.3,85.4 423.4,81.5 423.4,77.8 423.4,73.8 425.3,71.3 428.1,68.3 431.1,65.3 433,64.2 436.6,64.3 441.3,64.3 446.9,64.4 452.5,64.4 458.4,64.4 464.4,64.5 468.5,72.7 463.5,72.7 456.3,72.8 449,72.7 443.1,72.7 437.3,72.7 433.4,76.5 433.3,81.9 433.2,85.2 431.8,89.4 429,92.4 425.5,95.7 422,99.4 417.7,103.3 411.5,103.2 348.9,111.3 366.5,103.5 21,80 21,70 21,60 21,50 21,40 21,31 30,31 40,31 50,31 60,31 30,99 40,99 50,99 60,99 70,99 80,99 90,99 100,99 110,99 120,99 130,99 140,99 150,99 160,99 170,99 180,99 190,99 200,99 210,99 220,99 230,99 240,99 250,99 260,99 267,103 268,99 70,31 80,31 90,31 100,31 110,31 120,31 130,31 140,31 150,31 160,31 170,31 180,31 190,31 200,31 210,31 220,31 230,31 240,31 250,31 260,31 270,31 280,31 273,112 285.2,127.6
  pour GND1 (rank 2): 20,100 286,100 286,30 20,30
  pour GND1: 365,104 291,104 285,98 280,90 250,90 283,123 283,133 365,133
  pour LowSpeed: 20,100 286,100 286,30 20,30
  pour GND2: 365,104 418,104 434,88 434,75.8 436.8,73 474.2,73 474.2,64.5 471.3,64.5 471.3,64 431.6,64 423,72.6 423,85 414,94 353.3,94 343,104 343,106 333,116 333,120 365,120
  pour LowSpeed: 343.2,104 291,104 285,98 280,90 250,90 283,123 283,133 365,133 365,104 358.8,104 351,96.2
  pour GND1 (isolate 0.1, rank 2): 365,104 418,104 434,88 434,75.8 436.8,73 474.2,73 474.2,64.5 471.3,64.5 471.3,64 431.6,64 423,72.6 423,85 414,94 353.3,94 343,104 343,106 333,116 333,120 365,120
AIO_0  (via drill 0.3, 0.5)  (1 unrouted)
  GND1 0.2: J33.20 470.72,64.68 v470.7,64.7
  GND1 0.5: v48,90 50,90 D5.C
  HighSpeed 0.2: J15.3 337.28,107.8 344.32,107.8 356.61,95.52 414.49,95.52 424,86 424,74 432.85,65.15 465.55,65.15 466,64.7 v470.7,64.7
  GND2 0.2: J15.3 323.18,118.1 316.8,118.1 313.53,121.37 J27.24
  GND2 0.5: J27.24 311.7,120.1 311.7,117.8 299.9,106 291,106 281,96 281,81.5 270.8,71.3 67,71.3 48.3,90 v48,90 J9.1
AIO_1  (via drill 0.3, 0.5)  (1 unrouted)
  GND1 0.2: J33.7 470.22,65.32 v470.2,65.3
  GND1 0.5: D6.C 70,40 v68,40
  HighSpeed 0.2: J27.22 311.7,120.1 313.9,120.1 315.51,121.71 325.91,121.71 J15.4 338.62,109 344.02,109 356.87,96.15 414.85,96.15 424.7,86.3 424.7,74.3 433.3,65.7 466,65.7 466.4,65.3 v470.2,65.3
  HighSpeed 0.5: v280,71.5 280,97 290,107 298.4,107 309.2,117.8 309.2,120.14 J27.22
  GND2 0.5: J10.1 v68,40 88,60 268.5,60 v280,71.5
AIO_2  (via drill 0.3, 0.5)  (1 unrouted)
  GND1 0.2: J33.19 470.75,65.95 v470.7,65.9
  GND1 0.5: v88,90 90,90 D7.C
  HighSpeed 0.2: J15.5 340.16,110 343.92,110 357.13,96.78 415.21,96.78 425.5,86.5 425.5,74.5 433.6,66.4 466.3,66.4 466.8,65.9 v470.7,65.9
  GND2 0.2: J15.5 328.04,122.12 315.6,122.12 315.02,122.7 309.22,122.7 J27.20
  GND2 0.5: J27.20 306.6,120.08 306.6,117.7 296.9,108 289,108 279,98 279,84 268.5,73.5 104.5,73.5 103.75,74.25 | J11.1 v88,90 103.75,74.25 | 103.75,74.25 104,74
AIO_3  (via drill 0.3, 0.5)  (1 unrouted)
  GND1 0.2: J33.6 470.21,66.59 v470.2,66.6
  GND1 0.5: v108,40 110,40 D8.C
  HighSpeed 0.2: 305.24,121.26 307.38,123.4 315.25,123.4 316.1,122.55 330.15,122.55 J15.6 341.7,111 343.82,111 357.4,97.42 415.58,97.42 426.3,86.7 426.3,74.7 433.95,67.05 466.45,67.05 466.9,66.6 v470.2,66.6
  HighSpeed 0.5: v278,66.5 278,99 288,109 295.4,109 304.1,117.7 304.1,120.12 305.24,121.26 J27.18
  GND2 0.5: v278,66.5 269,57.5 125.5,57.5 v108,40 J12.1
AIO_4  (via drill 0.3, 0.5)  (1 unrouted)
  GND1 0.2: J33.18 470.72,67.22 v470.7,67.2
  GND1 0.5: v128,90 130,90 D9.C
  HighSpeed 0.2: J15.7 343.18,112.06 343.66,112.06 357.66,98.06 415.94,98.06 427.1,86.9 427.1,74.8 434.3,67.6 466.9,67.6 467.3,67.2 v470.7,67.2
  GND2 0.2: J15.7 332.24,123 316.5,123 315.5,124 305.44,124 J27.16
  GND2 0.5: J27.16 301.5,120.06 301.5,117.8 293.7,110 287,110 277,100 277,86.5 266.15,75.65 142.5,75.65 128.15,90 v128,90 J13.1
AIO_5  (via drill 0.3, 0.5)  (1 unrouted)
  GND1 0.2: J33.5 470.26,67.86 v470.2,67.8
  GND1 0.5: v148,40 150,40 D10.C
  HighSpeed 0.2: J27.14 303.35,124.45 316.92,124.45 317.9,123.47 334.31,123.47 J15.8 348.19,109.59 348.19,108.42 358,98.61 416.29,98.61 427.8,87.1 427.8,75.1 434.6,68.3 467.1,68.3 467.6,67.8 v470.2,67.8
  HighSpeed 0.5: v276,61 276,101 286,111 291.7,111 299,118.3 299,120.1 J27.14
  GND2 0.5: J14.1 v148,40 163,55 270,55 v276,61
AIO_6  (via drill 0.3, 0.5)
  GND1 0.2: J33.17 v470.71,68.49 v470.7,68.5
  GND1 0.5: v168,90 170,90 D11.C
  HighSpeed 0.2: v470.7,68.5 467.9,68.5 467.4,69 434.9,69 428.5,75.4 428.5,87.3 416.48,99.33 359,99.33 350.08,108.25 J16.3
  GND2 0.2: J27.12 302.76,126.4 348.76,126.4 J16.11 J16.3
  GND2 0.5: J27.12 296.5,120.14 296.5,117.9 290.6,112 285,112 275,102 275,88.5 264.55,78.05 180,78.05 168.05,90 v168,90 J21.1
AIO_7  (via drill 0.3, 0.5)
  GND1 0.2: J33.4 470.23,69.13 v470.2,69.1
  GND1 0.5: v188,40 190,40 D12.C
  HighSpeed 0.2: J27.10 300.62,126.8 350.9,126.8 J16.12 J16.4 352.62,106.93 359.5,100.05 416.65,100.05 429.2,87.5 429.2,75.8 435.3,69.7 467.7,69.7 468.3,69.1 v470.2,69.1
  HighSpeed 0.5: v274,56 274,103 284,113 289.1,113 293.9,117.8 293.9,120.08 J27.10
  GND2 0.5: v274,56 270.5,52.5 200.5,52.5 v188,40 J22.1
AIO_8  (via drill 0.3, 0.5)
  GND1 0.2: J33.16 470.74,69.76 v470.7,69.8
  GND1 0.5: v208,90 210,90 D13.C
  HighSpeed 0.2: v470.7,69.8 468.8,69.8 468.3,70.3 435.8,70.3 429.9,76.2 429.9,87.7 417,100.59 360.5,100.59 355.16,105.94 J16.5
  GND2 0.2: J27.8 298.48,127.2 353.04,127.2 J16.13 J16.5
  GND2 0.5: J27.8 291.4,120.12 291.4,117.9 287.5,114 283,114 273,104 273,90.5 264.5,82 216,82 v208,90 J23.1
AIO_9  (via drill 0.3, 0.5)
  GND1 0.2: J33.3 v470.2,70.4
  GND1 0.5: v228,40 230,40 D14.C
  HighSpeed 0.2: 289.97,121.23 296.34,127.6 355.18,127.6 J16.14 J16.6 357.7,105.03 361.5,101.23 417.27,101.23 430.8,87.7 430.8,76.2 436,71 468.7,71 469.3,70.4 v470.2,70.4
  HighSpeed 0.5: v272,51 272,105 282,115 286,115 288.9,117.9 288.9,120.16 289.97,121.23 J27.6
  GND2 0.5: v272,51 271,50 238,50 v228,40 J24.1
AIO_10  (via drill 0.3, 0.5)
  GND1 0.2: J33.15 470.77,71.03 v470.7,71.1
  GND1 0.5: v248,90 250,90 D15.C
  HighSpeed 0.2: v470.7,71.1 469.6,71.1 469.1,71.6 436.3,71.6 431.6,76.3 431.6,87.8 417.54,101.86 362.5,101.86 360.24,104.12 J16.7
  GND2 0.2: J27.4 294.25,128.05 357.27,128.05 J16.15 J16.7
  GND2 0.5: J27.4 286.3,120.1 286.3,117.8 284.5,116 281,116 271,106 271,92.8 268.2,90 v248,90 J25.1
AIO_11  (via drill 0.3, 0.5)
  GND1 0.2: J33.2 470.23,71.67 v470.2,71.7
  GND1 0.5: v268,40 270,40 D16.C
  HighSpeed 0.2: J27.2 292.21,128.55 359.31,128.55 J16.16 J16.8 362.78,103.22 363.5,102.5 417.9,102.5 432.4,88 432.4,76.3 436.5,72.2 469.7,72.2 v470.2,71.7
  HighSpeed 0.5: J27.2 284.47,121.37 270,106.9 270,42 v268,40
  GND2 0.5: J26.1 v268,40
BUTTON0  (via drill 0.3)
  GND1 0.1: U50.16 442.07,53.3 v440.4,53.3
  HighSpeed 0.1: v440.4,53.3 439.7,53.3 437.41,55.59 432.01,55.59 417.8,69.8 376.9,69.8 374.46,72.24 S6.SW1
BUTTON1  (via drill 0.3)
  GND1 0.1: U50.9 435.4,53.27 v435.3,53.18
  HighSpeed 0.1: v435.3,53.18 435.22,53.1 376,53.1 374.46,54.64 S5.SW1
BUTTON2  (via drill 0.3)
  GND1 0.1: U50.17 440.82,53.92 v440.8,53.9
  HighSpeed 0.1: v440.8,53.9 439.8,53.9 437.2,56.5 432.1,56.5 418.2,70.4 397,70.4 394.46,72.94 S8.SW1
BUTTON3  (via drill 0.3)
  GND1 0.1: U50.14 440.82,51.98 v440.8,52
  HighSpeed 0.1: v440.8,52 438.9,52 437.3,53.6 395.8,53.6 394.46,54.94 S7.SW1
BUTTON4  (via drill 0.3)
  GND1 0.1: v440.5,54.6 440.52,54.58 U50.18
  HighSpeed 0.1: v440.5,54.6 440,54.6 437.21,57.38 432.42,57.38 418.6,71.2 416.4,71.2 414.46,73.14 S10.SW1
BUTTON5  (via drill 0.3)
  GND1 0.1: U50.8 435.57,53.92 v435.3,54.2
  HighSpeed 0.1: v435.3,54.2 435,53.9 430.8,53.9 427.1,57.6 414.87,57.6 S9.SW1
DIN0  (via drill 0.3)  (1 unrouted)
  GND1 0.1: R34.2 v428.9,102.4 | v374.7,113.4 D30.4
  HighSpeed 0.1: J35.2 372.67,123.93 393.61,123.93 J36.2 410.14,107.4 420,107.4 425,102.4 v428.9,102.4
  LowSpeed 0.1: J35.2 368.8,120.06 368.8,117.1 372.5,113.4 v374.7,113.4
DIN0_P  (via drill 0.3)
  GND1 0.1: R34.1 D34.3 v433.7,101.5
  HighSpeed 0.1: v433.7,101.5 439.38,101.5 440.24,100.64 447.53,100.64 U49.14
DIN1  (via drill 0.3)
  GND1 0.1: v374.2,113.9 D30.3 | v437.2,103.4 437.86,102.74 R26.2
  HighSpeed 0.1: J36.12 J36.3 411.18,108.9 420.5,108.9 426,103.4 v437.2,103.4
  LowSpeed 0.1: v374.2,113.9 373.8,113.9 371.4,116.3 371.4,120.12 J35.4 378.79,127.51 390.28,127.51 394.6,123.19 398.19,123.19 J36.12
DIN1_P  (via drill 0.3)
  GND1 0.1: R26.1 441.6,102.4 D25.3 v442.8,102.4
  HighSpeed 0.1: v442.8,102.4 448.31,102.4 U49.15
DIN2  (via drill 0.3)  (1 unrouted)
  GND1 0.1: R32.2 v428.9,106.4 | D30.2 375,114.4 v374.5,114.9
  HighSpeed 0.1: J36.4 412.42,110.2 421.5,110.2 425.3,106.4 v428.9,106.4
  LowSpeed 0.1: J36.4 400.62,122 394.6,122 389.96,126.64 380.46,126.64 J35.6 373.9,120.08 373.9,115.5 v374.5,114.9
DIN2_P  (via drill 0.3)
  GND1 0.1: D32.3 R32.1 | 433.8,106.4 D32.3 | v433.7,105.4 D32.3
  HighSpeed 0.1: v433.7,105.4 434.4,104.7 439.6,104.7 440.7,103.6 449.65,103.6 U49.16
DIN3  (via drill 0.3)  (1 unrouted)
  GND1 0.1: v376.4,115 376.3,114.9 D30.1 | v437.2,107.4 437.86,106.74 R24.2
  HighSpeed 0.1: J36.5 413.58,111.58 422,111.58 426.18,107.4 v437.2,107.4
  LowSpeed 0.1: v376.4,115 376.5,115.1 376.5,120.14 J35.8 382.18,125.82 389.25,125.82 391.57,123.5 391.57,120.62 393.4,118.8 403.96,118.8 J36.5
DIN3_P  (via drill 0.3)
  GND1 0.1: R24.1 D23.3 v442.8,106.4
  HighSpeed 0.1: v442.8,106.4 452.13,106.4 U49.9
DIN4  (via drill 0.3)  (1 unrouted)
  GND1 0.1: R30.2 v428.9,110.4 | D30.10 v379.4,114.9
  HighSpeed 0.1: J36.6 414.75,112.95 422.55,112.95 425.1,110.4 v428.9,110.4
  LowSpeed 0.1: 379.7,114.9 v379.4,114.9 379,115.3 379,120.1 J35.10 383.8,124.9 388.95,124.9 390.85,123 390.85,120.15 392.9,118.1 405.8,118.1 J36.6
DIN4_P  (via drill 0.3)
  GND1 0.1: R30.1 D29.3 v433.7,109.6
  HighSpeed 0.1: v433.7,109.6 434.5,108.8 451.99,108.8 U49.10
DIN5  (via drill 0.3)  (1 unrouted)
  GND1 0.1: v381.1,114.4 D30.9 380.1,114.4 | v437.2,111.4 437.86,110.74 R22.2
  HighSpeed 0.1: J36.7 415.92,114.32 423.18,114.32 426.1,111.4 v437.2,111.4
  LowSpeed 0.1: v381.1,114.4 381.7,115 381.7,120.26 J35.12 385.32,123.88 388.67,123.88 390.05,122.5 390.05,119.85 392.6,117.3 407.54,117.3 J36.7
DIN5_P  (via drill 0.3)
  GND1 0.1: R22.1 D20.3 v442.8,110.4
  HighSpeed 0.1: v442.8,110.4 451.05,110.4 U49.11
DIN6  (via drill 0.3)  (1 unrouted)
  GND1 0.1: R28.2 v428.9,114.4 | D30.7 v381.8,113.4
  HighSpeed 0.1: J36.8 416.99,115.79 423.71,115.79 425.1,114.4 v428.9,114.4
  LowSpeed 0.1: J36.8 409.08,116.3 392.4,116.3 389.3,119.4 389.3,122 388.3,123 386.98,123 J35.14 384.1,120.12 384.1,115.7 v381.8,113.4
DIN6_P  (via drill 0.3)
  GND1 0.1: R28.1 D27.3 v433.7,113.6
  HighSpeed 0.1: v433.7,113.6 434.5,112.8 438,112.8 439,111.8 449.91,111.8 U49.12
DIN7  (via drill 0.3)  (1 unrouted)
  GND1 0.1: v437.2,115.4 437.86,114.74 R20.2 | D30.6 380.6,112.9 380.65,112.85 380.7,112.8 v380.7,112.4
  HighSpeed 0.1: J36.9 418.51,116.81 435.79,116.81 v437.2,115.4
  LowSpeed 0.1: J35.16 386.6,120.08 386.6,115.29 | J36.9 410.61,115.29 386.6,115.29 | v380.7,112.4 383.71,112.4 386.6,115.29
DIN7_P  (via drill 0.3)
  GND1 0.1: R20.1 D18.3 v442.8,114.4
  HighSpeed 0.1: v442.8,114.4 449.01,114.4 U49.13
DOUT0  (via drill 0.3)  (1 unrouted)
  GND1 0.1: v421.1,119.6 420.7,120 D21.10 | R19.2 457.8,111.1 457.8,110.6 v457.1,110.6
  LowSpeed 0.1: v421.1,119.6 422.2,118.5 425.04,118.5 J34.2 428.54,118 447.74,118 J32.2 452.4,120.08 452.4,118.2 455.9,114.7 455.9,111.8 v457.1,110.6
DOUT0_P
  GND1 0.1: 460.7,110.6 D17.3 460.7,109.3 460,110 460,111.1 R19.1 459.94,111.67 U49.8
DOUT1  (via drill 0.3)  (1 unrouted)
  GND1 0.1: D21.9 v420.2,119.6 | R21.2 461.36,111.2 v461,111.2
  HighSpeed 0.1: J32.4 452.42,122.6 449.4,122.6 445.3,118.5 430.58,118.5 J34.3 427.44,118.36 421.44,118.36 v420.2,119.6
  LowSpeed 0.1: 453.65,121.45 J32.4 453.73,121.37 454.9,120.2 454.9,117.9 458.3,114.5 458.3,113.2 460.3,111.2 v461,111.2
DOUT1_P
  GND1 0.1: 464.3,113.49 U49.7 463.54,112.73 R21.1 463.54,110.06 464.3,109.3 D19.3
DOUT2  (via drill 0.3)  (1 unrouted)
  GND1 0.1: D21.2 v420.2,126.5 | v465.8,112.1 465.13,111.43 465.13,111.1 R23.2
  HighSpeed 0.1: J32.6 457.5,120.06 457.5,118.2 459.9,115.8 464.9,115.8 466,114.7 466,112.3 v465.8,112.1
  LowSpeed 0.1: J32.6 454.53,123.03 449.53,123.03 448.1,121.6 435.1,121.6 J34.13 429.8,126.9 420.6,126.9 v420.2,126.5
DOUT2_P
  GND1 0.1: 467.9,109 D22.3 467.8,109.2 467.8,109.4 467.14,110.06 R23.1 | R23.1 467.2,111.04 | U49.6 467.14,113.79 R23.1
DOUT3  (via drill 0.3)  (1 unrouted)
  GND1 0.1: v419.2,121.8 D21.7 | v468.6,112.2 468.6,110.9 468.8,110.7 468.8,110.96 R25.2
  HighSpeed 0.1: v419.2,121.8 419.8,122.4 431.76,122.4 J34.5 435.86,121.7 446,121.7 447.6,123.3 456.8,123.3 J32.8 460,120.1 460,118.2 461.8,116.4 467.1,116.4 468.5,115 468.5,112.3 v468.6,112.2
DOUT3_P
  GND1 0.1: D24.3 471.5,109.4 470.74,110.16 R25.1 470.74,112.99 U49.5
DOUT4  (via drill 0.3)  (1 unrouted)
  GND1 0.1: D21.3 v419.7,126 | v471.6,112.1 472.26,111.44 R27.2
  HighSpeed 0.1: J32.10 462.5,120.14 462.5,118.2 463.7,117 469.27,117 471.1,115.17 471.1,112.6 v471.6,112.1
  LowSpeed 0.1: J32.10 458.74,123.9 448.9,123.9 447.6,122.6 439.18,122.6 J34.15 434.38,127.4 420.53,127.4 419.7,126.57 v419.7,126
DOUT4_P
  GND1 0.1: D26.3 475.1,109.4 474.4,110.1 474.4,111.04 R27.1 472.35,113.09 U49.4
DOUT5  (via drill 0.3)  (1 unrouted)
  GND1 0.1: D21.6 v418.7,121.4 | v475.3,112 475.86,111.44 R29.2
  HighSpeed 0.1: 418.7,121.3 v418.7,121.4 418.7,122.2 419.9,123.4 437.56,123.4 J34.16 440.72,123.6 445.7,123.6 446.5,124.4 460.78,124.4 J32.12 463.83,121.37 465.1,120.1 465.1,118.3 465.8,117.6 471.21,117.6 473.5,115.31 473.5,113.3 474.8,112 v475.3,112
DOUT5_P
  GND1 0.1: D28.3 478.7,110.34 R29.1 477.71,111.1 U49.3
DOUT6  (via drill 0.3)  (1 unrouted)
  GND1 0.1: D21.4 v419.2,126.7 | v472.8,117.9 474.1,116.6 R31.2
  HighSpeed 0.1: J32.14 467.62,120.1 470.6,120.1 v472.8,117.9
  LowSpeed 0.1: J32.14 460.91,126.81 443.51,126.81 J34.17 438.96,127.9 420.4,127.9 v419.2,126.7
DOUT6_P
  GND1 0.1: D31.3 476.54,117.46 R31.1 476.54,114.81 U49.2
DOUT7  (via drill 0.3)  (1 unrouted)
  GND1 0.1: D21.1 v420.7,126 | v477.2,117.8 478.4,116.6 R33.2
  HighSpeed 0.1: v420.7,126 421.2,126.5 442.9,126.5 J34.18 445.07,125.83 464.43,125.83 J32.16 473.63,121.37 v477.2,117.8
DOUT7_P
  GND1 0.1: D33.3 480.84,117.46 R33.1 480.84,114.79 U49.1
GND  (via drill 0.3, 0.5)
  GND1 0.2: U51.15 U51.14 | v439.9,81.3 440,81.2 R11.2 | v439.9,80 440.2,79.7 R12.2 | U50.2 437.93,57.83 438.9,58.8 438.9,59.87 C43.1 | v466.8,95.1 C49.2 | C48.2 v466.8,90.3 | C46.2 v461,90.6 | C47.2 v460.4,95.2 | v457.1,94.9 457.62,94.9 U52.4 | v462.9,94.9 463.32,94.9 U53.4 | D18.1 443.9,113.4 | D20.1 443.9,109.4 | D23.1 443.9,105.5
  GND1 0.254: U47.B5 U47.C5 U47.D5 | U47.C2 U47.C1
  GND1 0.3: U51.14 C44.2 v466.2,103.2 | C45.2 v467.6,103.2 | v465.9,100.9 465.88,100.92 U51.9 U51.10 | U48.4 479.8,104.8 480.4,104.2 C42.1 481.27,103.53 v481.3,103.5 | v458.5,100.5 458.5,100.72 U51.8
  GND1 0.5: C43.1 v437.8,59.9 | 477.9,72.3 479.8,74.2 | U48.4
  GND2 0.5: 477.9,72.3 479.8,74.2